# Altium PCB Copy of SensorBoard_PCB.PcbDoc (part 2 of 2)
Units mm, origin at the board's own origin, x right, y up, seen from the top; angles counter-clockwise.
Board outline 30.25 x 32.48 mm, 4 copper layers (Top Layer, GND, 3.3V, Bottom Layer), stack 0.603 mm thick; 41 components, 34 nets, 216 pads, 30 vias.
Unrouted connection lines stored in the file: 10.
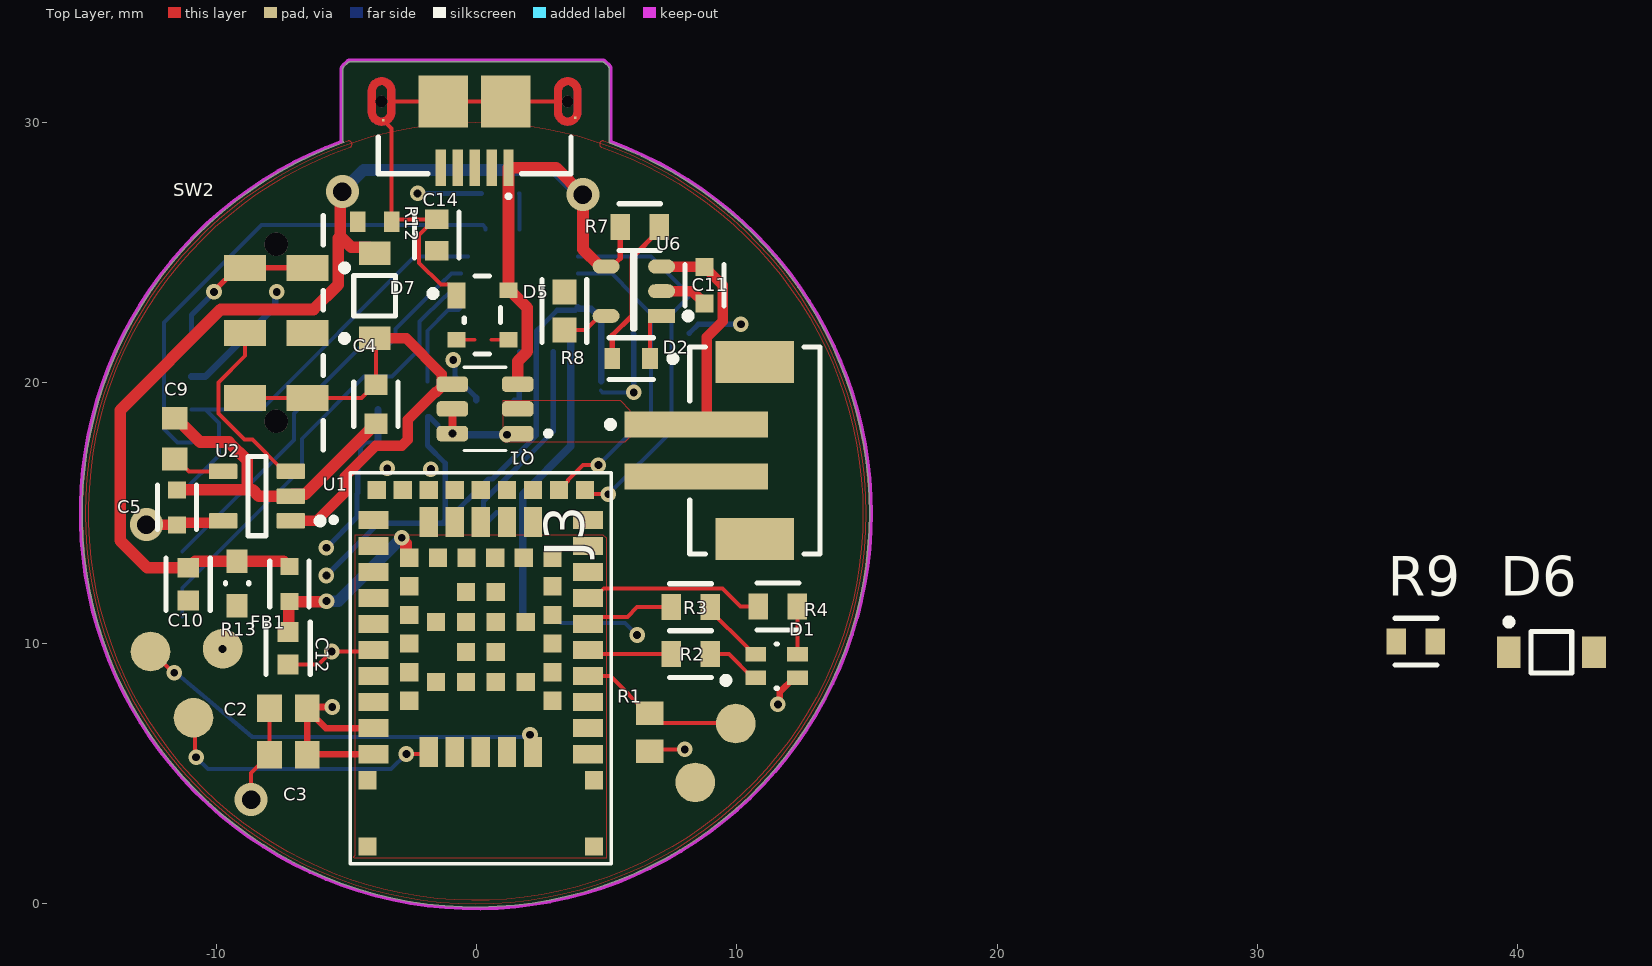
[diagram p0: Top Layer view]

## Other copper (continued)
Bottom Layer: (continued)
  region net NetC14_1: 3.478,29.886 3.45,29.888 3.423,29.892 3.396,29.897 3.369,29.903 3.343,29.911 3.317,29.92 3.292,29.931 3.267,29.942 3.243,29.956 3.219,29.97 3.197,29.985 3.175,30.002 3.154,30.02 3.134,30.039 3.115,30.059 3.097,30.08 3.08,30.102 3.065,30.124 3.051,30.148 3.037,30.172 3.026,30.197 3.015,30.222 3.006,30.248 2.998,30.274 2.992,30.301 2.987,30.328 2.983,30.355 2.981,30.383 2.98,30.41 2.98,30.81 3.28,30.81 3.28,30.41 3.281,30.398 3.281,30.387 3.283,30.375 3.285,30.363 3.288,30.352 3.291,30.341 3.295,30.33 3.3,30.319 3.305,30.308 3.31,30.298 3.317,30.288 3.323,30.278 3.33,30.269 3.338,30.26 3.346,30.251 3.355,30.243 3.364,30.235 3.373,30.228 3.383,30.221 3.393,30.215 3.403,30.21 3.414,30.205 3.425,30.2 3.436,30.196 3.447,30.193 3.458,30.19 3.47,30.188 3.482,30.186 3.493,30.186 3.505,30.185 3.517,30.186 3.529,30.186 3.54,30.188 3.552,30.19 3.563,30.193 3.575,30.196 3.586,30.2 3.597,30.205 3.607,30.21 3.618,30.215 3.628,30.221 3.637,30.228 3.647,30.235 3.656,30.243 3.664,30.251 3.672,30.26 3.68,30.269 3.687,30.278 3.694,30.288 3.7,30.298 3.706,30.308 3.711,30.319 3.715,30.33 3.719,30.341 3.723,30.352 3.725,30.363 3.727,30.375 3.729,30.387 3.73,30.398 3.73,30.41 3.73,30.81 4.03,30.81 4.03,30.41 4.029,30.383 4.027,30.355 4.024,30.328 4.019,30.301 4.012,30.274 4.005,30.248 3.995,30.222 3.985,30.197 3.973,30.172 3.96,30.148 3.946,30.124 3.93,30.102 3.913,30.08 3.895,30.059 3.876,30.039 3.856,30.02 3.836,30.002 3.814,29.985 3.791,29.97 3.768,29.956 3.744,29.942 3.719,29.931 3.693,29.92 3.667,29.911 3.641,29.903 3.614,29.897 3.587,29.892 3.56,29.888 3.533,29.886 3.505,29.885
  region net NetC14_1: 2.98,31.21 2.981,31.238 2.983,31.265 2.987,31.292 2.992,31.319 2.998,31.346 3.006,31.372 3.015,31.398 3.026,31.424 3.037,31.449 3.051,31.473 3.065,31.496 3.08,31.519 3.097,31.541 3.115,31.561 3.134,31.581 3.154,31.6 3.175,31.618 3.197,31.635 3.219,31.651 3.243,31.665 3.267,31.678 3.292,31.69 3.317,31.7 3.343,31.71 3.369,31.717 3.396,31.724 3.423,31.729 3.45,31.732 3.478,31.734 3.505,31.735 3.533,31.734 3.56,31.732 3.587,31.729 3.614,31.724 3.641,31.717 3.667,31.71 3.693,31.7 3.719,31.69 3.744,31.678 3.768,31.665 3.791,31.651 3.814,31.635 3.836,31.618 3.856,31.6 3.876,31.581 3.895,31.561 3.913,31.541 3.93,31.519 3.946,31.496 3.96,31.473 3.973,31.449 3.985,31.424 3.995,31.398 4.005,31.372 4.012,31.346 4.019,31.319 4.024,31.292 4.027,31.265 4.029,31.238 4.03,31.21 4.03,30.81 3.73,30.81 3.73,31.21 3.73,31.222 3.729,31.234 3.727,31.245 3.725,31.257 3.723,31.268 3.719,31.28 3.715,31.291 3.711,31.302 3.706,31.312 3.7,31.323 3.694,31.333 3.687,31.342 3.68,31.352 3.672,31.361 3.664,31.369 3.656,31.377 3.647,31.385 3.637,31.392 3.628,31.399 3.618,31.405 3.607,31.411 3.597,31.416 3.586,31.42 3.575,31.424 3.563,31.428 3.552,31.43 3.54,31.432 3.529,31.434 3.517,31.435 3.505,31.435 3.493,31.435 3.482,31.434 3.47,31.432 3.458,31.43 3.447,31.428 3.436,31.424 3.425,31.42 3.414,31.416 3.403,31.411 3.393,31.405 3.383,31.399 3.373,31.392 3.364,31.385 3.355,31.377 3.346,31.369 3.338,31.361 3.33,31.352 3.323,31.342 3.317,31.333 3.31,31.323 3.305,31.312 3.3,31.302 3.295,31.291 3.291,31.28 3.288,31.268 3.285,31.257 3.283,31.245 3.281,31.234 3.281,31.222 3.28,31.21 3.28,30.81 2.98,30.81
  region net NetC14_1: -3.672,29.886 -3.7,29.888 -3.727,29.892 -3.754,29.897 -3.781,29.903 -3.807,29.911 -3.833,29.92 -3.858,29.931 -3.883,29.942 -3.907,29.956 -3.931,29.97 -3.953,29.985 -3.975,30.002 -3.996,30.02 -4.016,30.039 -4.035,30.059 -4.053,30.08 -4.07,30.102 -4.085,30.124 -4.099,30.148 -4.113,30.172 -4.124,30.197 -4.135,30.222 -4.144,30.248 -4.152,30.274 -4.158,30.301 -4.163,30.328 -4.167,30.355 -4.169,30.383 -4.17,30.41 -4.17,30.81 -3.87,30.81 -3.87,30.41 -3.869,30.398 -3.869,30.387 -3.867,30.375 -3.865,30.363 -3.862,30.352 -3.859,30.341 -3.855,30.33 -3.85,30.319 -3.845,30.308 -3.84,30.298 -3.834,30.288 -3.827,30.278 -3.82,30.269 -3.812,30.26 -3.804,30.251 -3.795,30.243 -3.786,30.235 -3.777,30.228 -3.767,30.221 -3.757,30.215 -3.747,30.21 -3.736,30.205 -3.725,30.2 -3.714,30.196 -3.703,30.193 -3.692,30.19 -3.68,30.188 -3.668,30.186 -3.657,30.186 -3.645,30.185 -3.633,30.186 -3.621,30.186 -3.61,30.188 -3.598,30.19 -3.587,30.193 -3.575,30.196 -3.564,30.2 -3.553,30.205 -3.543,30.21 -3.532,30.215 -3.522,30.221 -3.513,30.228 -3.503,30.235 -3.494,30.243 -3.486,30.251 -3.478,30.26 -3.47,30.269 -3.463,30.278 -3.456,30.288 -3.45,30.298 -3.444,30.308 -3.439,30.319 -3.435,30.33 -3.431,30.341 -3.427,30.352 -3.425,30.363 -3.423,30.375 -3.421,30.387 -3.42,30.398 -3.42,30.41 -3.42,30.81 -3.12,30.81 -3.12,30.41 -3.121,30.383 -3.123,30.355 -3.126,30.328 -3.131,30.301 -3.138,30.274 -3.145,30.248 -3.155,30.222 -3.165,30.197 -3.177,30.172 -3.19,30.148 -3.204,30.124 -3.22,30.102 -3.237,30.08 -3.255,30.059 -3.274,30.039 -3.294,30.02 -3.314,30.002 -3.336,29.985 -3.359,29.97 -3.382,29.956 -3.406,29.942 -3.431,29.931 -3.457,29.92 -3.483,29.911 -3.509,29.903 -3.536,29.897 -3.563,29.892 -3.59,29.888 -3.617,29.886 -3.645,29.885
  region net NetC14_1: -4.17,31.21 -4.169,31.238 -4.167,31.265 -4.163,31.292 -4.158,31.319 -4.152,31.346 -4.144,31.372 -4.135,31.398 -4.124,31.424 -4.113,31.449 -4.099,31.473 -4.085,31.496 -4.07,31.519 -4.053,31.541 -4.035,31.561 -4.016,31.581 -3.996,31.6 -3.975,31.618 -3.953,31.635 -3.931,31.651 -3.907,31.665 -3.883,31.678 -3.858,31.69 -3.833,31.7 -3.807,31.71 -3.781,31.717 -3.754,31.724 -3.727,31.729 -3.7,31.732 -3.672,31.734 -3.645,31.735 -3.617,31.734 -3.59,31.732 -3.563,31.729 -3.536,31.724 -3.509,31.717 -3.483,31.71 -3.457,31.7 -3.431,31.69 -3.406,31.678 -3.382,31.665 -3.359,31.651 -3.336,31.635 -3.314,31.618 -3.294,31.6 -3.274,31.581 -3.255,31.561 -3.237,31.541 -3.22,31.519 -3.204,31.496 -3.19,31.473 -3.177,31.449 -3.165,31.424 -3.155,31.398 -3.145,31.372 -3.138,31.346 -3.131,31.319 -3.126,31.292 -3.123,31.265 -3.121,31.238 -3.12,31.21 -3.12,30.81 -3.42,30.81 -3.42,31.21 -3.42,31.222 -3.421,31.234 -3.423,31.245 -3.425,31.257 -3.427,31.268 -3.431,31.28 -3.435,31.291 -3.439,31.302 -3.444,31.312 -3.45,31.323 -3.456,31.333 -3.463,31.342 -3.47,31.352 -3.478,31.361 -3.486,31.369 -3.494,31.377 -3.503,31.385 -3.513,31.392 -3.522,31.399 -3.532,31.405 -3.543,31.411 -3.553,31.416 -3.564,31.42 -3.575,31.424 -3.587,31.428 -3.598,31.43 -3.61,31.432 -3.621,31.434 -3.633,31.435 -3.645,31.435 -3.657,31.435 -3.668,31.434 -3.68,31.432 -3.692,31.43 -3.703,31.428 -3.714,31.424 -3.725,31.42 -3.736,31.416 -3.747,31.411 -3.757,31.405 -3.767,31.399 -3.777,31.392 -3.786,31.385 -3.795,31.377 -3.804,31.369 -3.812,31.361 -3.82,31.352 -3.827,31.342 -3.834,31.333 -3.84,31.323 -3.845,31.312 -3.85,31.302 -3.855,31.291 -3.859,31.28 -3.862,31.268 -3.865,31.257 -3.867,31.245 -3.869,31.234 -3.869,31.222 -3.87,31.21 -3.87,30.81 -4.17,30.81

## Silkscreen, mask and mechanical layers (free items; w line width, h text height)
Top Overlay:
  circle w0.2: c1.23,27.17 r0.051
  lines w0.2: -3.77,29.44 -3.77,28.035 -1.87,28.035 ; 1.73,28.035 3.63,28.035 3.63,29.44
Top Paste:
  drawing of 4 lines, arcs and shapes, not listed
Bottom Paste:
  drawing of 4 lines, arcs and shapes, not listed
Top Solder:
  region: 2.78,31.962 4.236,31.962 4.236,29.66 2.78,29.66
  region: -4.37,31.962 -2.925,31.962 -2.925,29.66 -4.37,29.66
Bottom Solder:
  region: 2.78,31.962 4.237,31.962 4.237,29.66 2.78,29.66
  region: -4.37,31.962 -2.925,31.962 -2.925,29.66 -4.37,29.66
Mechanical 1:
  lines w0: -3.87,30.41 ccw(c-3.645,30.41) -3.645,30.185 ccw(c-3.645,30.41) -3.42,30.41 -3.42,31.21 ccw(c-3.645,31.21) -3.645,31.435 ccw(c-3.645,31.21) -3.87,31.21 -3.87,30.41 ; 3.28,30.41 ccw(c3.505,30.41) 3.505,30.185 ccw(c3.505,30.41) 3.73,30.41 3.73,31.21 ccw(c3.505,31.21) 3.505,31.435 ccw(c3.505,31.21) 3.28,31.21 3.28,30.41
Mechanical 13:
  lines w0.1: -3.77,28.035 3.63,28.035 3.63,33.585 -3.77,33.585 -3.77,28.035
  lines w0.2: -6.07,32.26 5.93,32.26
  text "PCB Edge" at 1.835,33.351 h0.67 r180
Mechanical 15:
  lines w0.05: -4.57,27.3 4.43,27.31 4.43,33.81 -4.57,33.81 -4.57,27.3
  lines w0.1: -0.578,30.81 0.438,30.81 ; -0.07,30.302 -0.07,31.318